# Altium PCB TourniquetPCBV1.PcbDoc (part 1 of 2)
Units mil, origin at the board's own origin, x right, y up, seen from the top; angles counter-clockwise.
Board outline 6000 x 4000 mil, 2 copper layers (Top Layer, Bottom Layer); 66 components, 50 nets, 230 pads, 0 vias.
Unrouted connection lines stored in the file: 158.
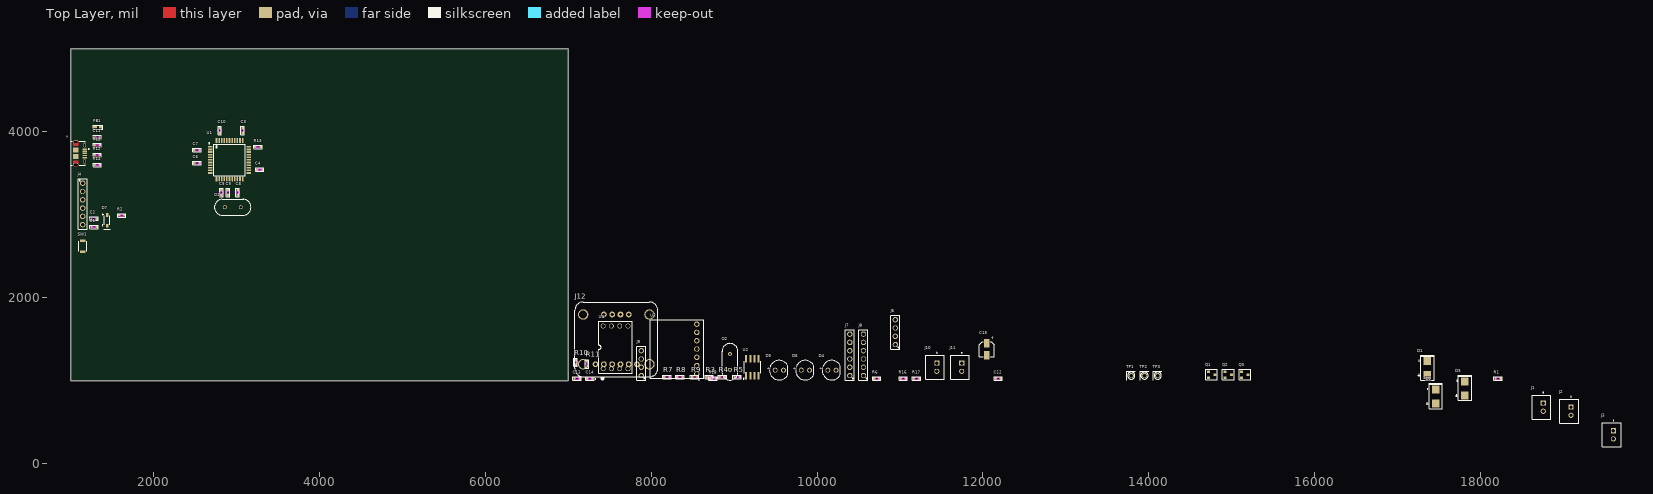
[diagram p0: Top Layer view]
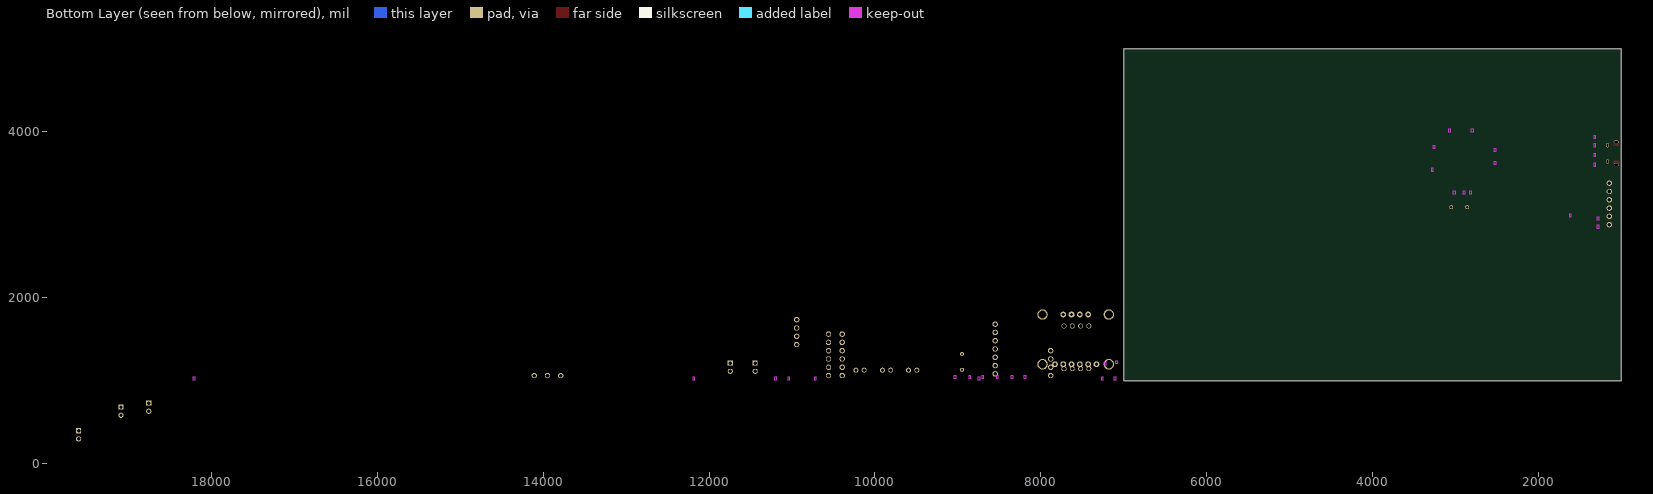
[diagram p1: Bottom Layer view, seen from below]

## Layer stack, top to bottom
Top Solder: solder mask 0.4, Solder Resist, Dk 3.5
Top Layer: signal copper 1.4
Dielectric 1: dielectric 12.6, FR-4, Dk 4.8
Bottom Layer: signal copper 1.4
Bottom Solder: solder mask 0.4, Solder Resist, Dk 3.5

## Board outline
1000,1000 7000,1000 7000,5000 1000,5000

## Design rules (kind name [scope] priority, off if disabled: settings)
Clearance [All] p1: gap=10 ignorepadtopadclearanceinfootprint=FALSE
DiffPairsRouting [All] p1: maxlimit=10 minlimit=10 mostfreqgap=10 toplayer_minwidth=15 toplayer_maxwidth=15 toplayer_prefwidth=15 bottomlayer_minwidth=15 bottomlayer_maxwidth=15 bottomlayer_prefwidth=15 maxuncoupledlength=500
PolygonConnect [All] p1: connectstyle=Relief reliefconductorwidth=10 reliefentries=4 polygonreliefangle="90 Angle" airgapwidth=10
RoutingVias [All] p1: holewidth=28 width=50 viastyle="Through Hole" minholewidth=28 minwidth=50 maxholewidth=28 maxwidth=50
SolderMaskExpansion [All] p1: expansion=4 istentingtop=FALSE
SupplyNets "Schematic Supply Nets_4" [InNet('VCC5VBAT_SW')] p1: voltage=0.000
SupplyNets "Schematic Supply Nets_3" [InNet('VCC5V0')] p2: voltage=0.000
SupplyNets "Schematic Supply Nets_2" [InNet('VCC5VBAT')] p3: voltage=0.000
SupplyNets "Schematic Supply Nets_1" [InNet('GND')] p4: voltage=0.000
Width [All] p1: maxlimit=10 minlimit=10 preferedwidth=10
29 further rules are at their usual default settings.

## Classes and differential pairs
differential pair RD: +RD_P -RD_N
differential pair D: +D_P -D_N

## Components (designator, comment, footprint, x,y, rotation, side; value= is the part's Value field where it differs from the comment)
* "Micro USB Type B" 10118194-0001LF 1112.2,3740.16 r270 top
C1 "0.1 uF" 0603_CAP 1279.53,2854.33 r180 top value=100nF
C2 "0.1 uF" 0603_CAP 1279.53,2952.76 r180 top value=100nF
C3 "0.1 uF" 0603_CAP 3070.87,4015.75 r90 top value=100nF
C4 "0.1 uF" 0603_CAP 3278.53,3543.31 r0 top value=100nF
C5 "0.1 uF" 0603_CAP 2814.96,3267.72 r270 top value=100nF
C6 "0.1 uF" 0603_CAP 2519.68,3622.05 r180 top value=100nF
C7 "0.1 uF" 0603_CAP 2519.68,3779.53 r180 top value=100nF
C8 "0.1 uF" 0603_CAP 3011.81,3267.72 r270 top value=100nF
C9 "0.1 uF" 0603_CAP 2893.7,3267.72 r270 top value=100nF
C10 "0.1 uF" 0603_CAP 2795.28,4015.75 r270 top value=100nF
C11 "0.1 uF" 0603_CAP 1318.9,3937.01 r180 top value=100nF
C12 "0.1 uF" 0603_CAP 12185,1025 r0 top value=100nF
C13 "0.1 uF" 0603_CAP 7105,1025 r0 top value=100nF
C14 "0.1 uF" 0603_CAP 7260,1025 r0 top value=100nF
C15 "865080340001" 865080340001 12047.24,1377.95 r90 top
D1 "B240AQ-13-F" SMA 17360,1150 r90 top
D2 "B240AQ-13-F" SMA 17460.63,807.09 r90 top
D3 "B240AQ-13-F" SMA 17814.96,905.51 r90 top
D4 "Through Hole LED" "RED LED" 10180,1125 r0 top
D5 "Through Hole LED" "RED LED" 9545,1125 r0 top
D6 "Through Hole LED" "RED LED" 9860,1125 r0 top
D7 "Diode" Diode 1437.01,2933.07 r90 top value=4pF
FB1 "Ferrite Bead 732-1591-2-ND" "Ferrite Bead" 1325.79,4055.12 r180 top value=100nF
J1 "B2B-XH-A" B2B-XH 18759.84,679.13 r90 top
J2 "B2B-XH-A" B2B-XH 19094.49,629.92 r90 top
J3 "B2B-XH-A" B2B-XH 19606.3,344.49 r90 top
J4 "6PIN_HEADER" 6_pin_2.54mm 1141.73,3129.92 r270 top
J6 "4 Digit 7 Segment Header" 4PIN_2.54mm 10944.88,1583.86 r90 top
J7 "6PIN_HEADER" 6_pin_2.54mm 10395,1310 r90 top
J8 "6PIN_HEADER" 6_pin_2.54mm 10560,1310 r90 top
J9 "4PIN_HEADER" 4PIN_2.54mm 7880,1210 r90 top
J10 "B2B-XH-A" B2B-XH 11445,1160 r90 top
J11 "B2B-XH-A" B2B-XH 11745,1160 r90 top
J12 "BNO055" BNO055 7578.73,1496.06 r0 top
O1 "830058383B" 830058383B 2952.76,3090.55 r180 top
O2 "AB26T-32.768KHZ-6-B" 830058383B 8950,1225 r90 top
Q1 "SI2300-TP" SOT23 14760,1070 r0 top
Q2 "SI2300-TP" SOT23 14960,1070 r0 top
Q3 "SI2300-TP" SOT23 15160,1070 r0 top
R1 "10k" 0603_RES 18215,1025 r0 top
R2 "330" 0603_RES 1614.17,2992.13 r180 top
R3 "100" 0603_RES 8700.77,1043.31 r0 top
R4 "100" 0603_RES 8858.25,1043.31 r0 top
R5 "100" 0603_RES 9035.42,1043.31 r0 top
R6 "1k" 0603_RES 10720,1025 r0 top
R7 "10k" 0603_RES 8188.96,1043.31 r0 top
R8 "10k" 0603_RES 8346.44,1043.31 r0 top
R9 "10k" 0603_RES 8523.6,1043.31 r0 top
R10 "4.7k" 0603_RES 7086.61,1220.47 r90 top
R11 "4.7k" 0603_RES 7224.41,1200.79 r90 top
R12 "22" 0603_RES 1318.9,3720.47 r180 top
R13 "10k" 0603_RES 3256.9,3818.9 r180 top
R14 "22" 0603_RES 1318.9,3602.36 r180 top
R15 "1k" 0603_RES 1318.9,3838.58 r0 top
R16 "1k" 0603_RES 11040,1025 r0 top
R17 "1k" 0603_RES 11200,1025 r0 top
R18 "10k" 0603_RES 8745,1025 r0 top
SW1 "SPST Push Button" "Push Button" 1141.73,2618.11 r90 top
TP1 "1PIN_HEADER_TEST" 1PIN_2.54mm 13790,1060 r0 top
TP2 "1PIN_HEADER_TEST" 1PIN_2.54mm 13950,1060 r0 top
TP3 "1PIN_HEADER_TEST" 1PIN_2.54mm 14110,1060 r0 top
U1 "ATMEGA32U4-AU" ATMEGA32U4-AU 2913.39,3661.42 r0 top
U2 "MCP7940M-I/SN" 8SOIC 9220,1160 r90 top
U3 "Adafruit Pressure Sensor" "Adafruit Pressure Sensor" 8550,1380 r90 top
U4 "SSCDANN015PDAA5" SSCDANN015PDAA5 7570,1400 r90 top

## Footprints (in the part's own frame and the unit in brackets; to place one, negate y for a bottom-side part, rotate by r counter-clockwise, add the part's x,y. Pads: shape width x height; smd on the part's side, far side on the other; paste and mask are expansions set on the pad)
1PIN_2.54mm [mm]
  round 1.65 hole 1.1: 1(0,0)
  silkscreen extent -1.37,-1.37 1.27,1.37
4PIN_2.54mm [mm]
  round 1.65 hole 1.1: 1(-3.81,0) 2(-1.27,0) 3(1.27,0) 4(3.81,0)
  silkscreen extent -5.18,-1.37 5.14,1.37
6_pin_2.54mm [mm]
  round 1.65 hole 1.1: 1(-6.35,0) 2(-3.81,0) 3(-1.27,0) 4(1.27,0) 5(3.81,0) 6(6.35,0)
  silkscreen extent -7.72,-1.37 7.72,1.37
8SOIC [mm]
  rect 2.2x0.6 smd: 1(-2.6,1.905) 2(-2.6,0.635) 3(-2.6,-0.635) 4(-2.6,-1.905) 5(2.6,-1.905) 6(2.6,-0.635) 7(2.6,0.635) 8(2.6,1.905)
  silkscreen extent -3.63,-2.5 1.9,2.78, body extent -3,-2.45 3,2.45, height 1.75
0603_CAP [mil]
  rect 30x32 smd paste+0 mask+0: 1(-30.5,0) 2(30.5,0)
  Top Layer keep-out region: -13.5,-14 -13.5,14 13.5,14 13.5,-14
  Keep-Out Layer region: -13.5,-16 -13.5,16 13.5,16 13.5,-16
  silkscreen extent -50,-21 50,21, body extent -31,-20 31,16, height 31
0603_RES [mil]
  rect 30x32 smd paste+0 mask+0: 1(-30.5,0) 2(30.5,0)
  Top Layer keep-out region: -13.5,-14 -13.5,14 13.5,14 13.5,-14
  Keep-Out Layer region: -13.5,-16 -13.5,16 13.5,16 13.5,-16
  silkscreen extent -50,-21 50,21, body extent -31,-16 31,16, height 28
10118194-0001LF [mm] "USB - micro B USB 2.0 Receptacle Connector 5 Position Surface Mount, Right Angle; Through Hole"
  rect 0.4x1.5 smd: 1(-1.3,1.375) 2(-0.65,1.375) 3(0,1.375) 4(0.65,1.375) 5(1.3,1.375)
  oval 0.775x1.55 hole 0.5 slot 1.15 at 90 deg mask+0: SH1(-3.5,-1.375) SH4(3.5,-1.375)
  rect 1.5x1.55 smd: SH2(1,-1.375) SH3(-1,-1.375)
  oval 1.3x0.95 hole 0.55 slot 0.9 at 0 deg: SH5(-2.5,1.325) SH6(2.5,1.325)
  Top Layer region: 3.471,-0.601 3.497,-0.603 3.523,-0.606 3.549,-0.611 3.574,-0.617 3.6,-0.624 3.624,-0.633 3.648,-0.643 3.672,-0.654 3.695,-0.667 3.717,-0.681 3.739,-0.695 3.76,-0.711 3.78,-0.728 3.799,-0.746 3.817,-0.765 3.834,-0.785 3.85,-0.806 3.864,-0.828 3.878,-0.85 3.891,-0.873 3.902,-0.897 3.912,-0.921 3.921,-0.945 3.928,-0.971 3.934,-0.996 3.939,-1.022 3.942,-1.048 3.944,-1.074 3.945,-1.1 3.945,-1.65 3.944,-1.676 3.942,-1.702 3.939,-1.728 3.934,-1.754 3.928,-1.779 3.921,-1.805 3.912,-1.829 3.902,-1.853 3.891,-1.877 3.878,-1.9 3.864,-1.922 3.85,-1.944 3.834,-1.965 3.817,-1.985 3.799,-2.004 3.78,-2.022 3.76,-2.039 3.739,-2.055 3.717,-2.069 3.695,-2.083 3.672,-2.096 3.648,-2.107 3.624,-2.117 3.6,-2.126 3.574,-2.133 3.549,-2.139 3.523,-2.144 3.497,-2.147 3.471,-2.149 3.445,-2.15 2.3,-2.15 2.3,-0.6 3.445,-0.6
  Top Layer region: -2.3,-2.15 -3.445,-2.15 -3.471,-2.149 -3.497,-2.147 -3.523,-2.144 -3.549,-2.139 -3.574,-2.133 -3.6,-2.126 -3.624,-2.117 -3.648,-2.107 -3.672,-2.096 -3.695,-2.083 -3.717,-2.069 -3.739,-2.055 -3.76,-2.039 -3.78,-2.022 -3.799,-2.004 -3.817,-1.985 -3.834,-1.965 -3.85,-1.944 -3.864,-1.922 -3.878,-1.9 -3.891,-1.877 -3.902,-1.853 -3.912,-1.829 -3.921,-1.805 -3.928,-1.779 -3.934,-1.754 -3.939,-1.728 -3.942,-1.702 -3.944,-1.676 -3.945,-1.65 -3.945,-1.1 -3.944,-1.074 -3.942,-1.048 -3.939,-1.022 -3.934,-0.996 -3.928,-0.971 -3.921,-0.945 -3.912,-0.921 -3.902,-0.897 -3.891,-0.873 -3.878,-0.85 -3.864,-0.828 -3.85,-0.806 -3.834,-0.785 -3.817,-0.765 -3.799,-0.746 -3.78,-0.728 -3.76,-0.711 -3.739,-0.695 -3.717,-0.681 -3.695,-0.667 -3.672,-0.654 -3.648,-0.643 -3.624,-0.633 -3.6,-0.624 -3.574,-0.617 -3.549,-0.611 -3.523,-0.606 -3.497,-0.603 -3.471,-0.601 -3.445,-0.6 -2.3,-0.6
  silkscreen extent -3.7,-2.82 3.7,2.73, body extent -4.02,-4.05 4.02,1.48, height 2.67
830058383B [mm]
  round 1.208 hole 0.7: 1(-2.44,0) 2(2.44,0)
  silkscreen extent -5.59,-2.42 5.64,2.43, body extent -5.53,-2.35 5.53,2.35, height 4.11
865080340001 [mm] "10 µF 16 V Aluminum Electrolytic Capacitors Radial, Can - SMD 2000 Hrs @ 105°C"
  rect 2.6x1.6 smd: 1(1.8,0) 2(-1.8,0)
  silkscreen extent -2.25,-2.25 2.25,2.25, body extent -2.45,-2.25 2.55,2.05, height 5.35
"Adafruit Pressure Sensor" [mm]
  round 1.65 hole 1.1: 1(-7.62,0) 2(-5.08,0) 3(-2.54,0) 4(0,0) 5(2.54,0) 6(5.08,0) 7(7.62,0)
  silkscreen extent -9.55,-2.1 8.98,14.23, body extent -8.97,-2.33 8.81,14.18, height 7.37
ATMEGA32U4-AU [mm]
  rect 1.5x0.5 smd: 1(-5.9,4) 2(-5.9,3.2) 3(-5.9,2.4) 4(-5.9,1.6) 5(-5.9,0.8) 6(-5.9,0) 7(-5.9,-0.8) 8(-5.9,-1.6) 9(-5.9,-2.4) 10(-5.9,-3.2) 11(-5.9,-4) 23(5.9,-4) 24(5.9,-3.2) 25(5.9,-2.4) 26(5.9,-1.6) 27(5.9,-0.8) 28(5.9,0) 29(5.9,0.8) 30(5.9,1.6) 31(5.9,2.4) 32(5.9,3.2) 33(5.9,4)
  rect 0.5x1.5 smd: 12(-4,-5.9) 13(-3.2,-5.9) 14(-2.4,-5.9) 15(-1.6,-5.9) 16(-0.8,-5.9) 17(0,-5.9) 18(0.8,-5.9) 19(1.6,-5.9) 20(2.4,-5.9) 21(3.2,-5.9) 22(4,-5.9) 34(4,5.9) 35(3.2,5.9) 36(2.4,5.9) 37(1.6,5.9) 38(0.8,5.9) 39(0,5.9) 40(-0.8,5.9) 41(-1.6,5.9) 42(-2.4,5.9) 43(-3.2,5.9) 44(-4,5.9)
  silkscreen extent -6.38,-4.8 4.8,5.23, body extent -6,-6 6,6, height 0.53
B2B-XH [mm]
  rect 1.575x1.575 / inner round 1.575 / far side rect 1.575x1.575 hole 1.05: 1(1.25,0)
  round 1.575 hole 1.05: 2(-1.25,0)
  silkscreen extent -3.7,-2.35 4.54,3.4, body extent -3.7,-2.4 3.7,3.35, height 7.01
BNO055 [mm]
  round 1.778 hole 1: 1(-6.35,-7.62) 2(-3.81,-7.62) 3(-1.27,-7.62) 4(1.27,-7.62) 5(3.81,-7.62) 6(6.35,-7.62) 7(-3.81,7.62) 8(-1.27,7.62) 9(1.27,7.62) 10(3.81,7.62)
  round 3.2 hole 2.5: P1(-10.16,7.62) P2(10.16,7.62) P3(-10.16,-7.62) P4(10.16,-7.62)
  silkscreen extent -12.7,-12.28 12.7,11.43, body extent -12.7,-10.16 12.7,10.16, height 4.6
Diode [mm]
  rrect18% 1.21x0.73 smd paste+0 mask+0.102: 1(-1.68,0) 2(1.68,0)
  silkscreen extent -2.79,-1.02 2.03,1.52, body extent -1.9,-0.8 1.9,0.8, height 1.01
"Ferrite Bead" [mm]
  rect 0.95x0.7 smd paste+0 mask+0.102: 1(-0.825,0) 2(0.825,0)
  rect 0.95x0.7 on Mech16 paste+0 mask+0.102: 1(-0.825,0) 2(0.825,0)
  silkscreen extent -1.45,-0.64 1.45,0.66, body extent -0.8,-0.4 0.8,0.4, height 0.81
"Push Button" [mm]
  rect 0.8x1.7 smd paste+0 mask+0.102: 1(-1.7,0) 2(1.7,0)
  silkscreen extent -1.5,-1.25 1.5,1.25, body extent -2,-1.25 2,1.25, height 1.75
"RED LED" [mm]
  round 1.508 hole 1: 1(-1.27,0) 2(1.27,0)
  silkscreen extent -3.03,-2.98 2.6,2.98, body extent -2.95,-2.94 2.45,2.94, height 8.7
SMA [mm]
  rect 2.5x2.3 smd: 1(-2.15,0) 2(2.15,0)
  silkscreen extent -3.7,-2.1 4,2.9, body extent -2.8,-1.97 2.8,1.97, height 2.45
SOT23 [mm]
  rect 0.9x0.8 smd: 1(-1,0.95) 2(-1,-0.95) 3(1,0)
  silkscreen extent -1.78,-1.59 1.78,1.6, body extent -1.32,-1.52 1.32,1.52, height 1.22
SSCDANN015PDAA5 [mm]
  round 1.5 hole 1.1: 1(-6.54,3.81) 2(-6.54,1.27) 3(-6.54,-1.27) 4(-6.54,-3.81) 5(6.54,-3.81) 6(6.54,-1.27) 7(6.54,1.27) 8(6.54,3.81)
  silkscreen extent -9.8,-5.08 8,5.08, body extent -6.65,-5 6.65,5, height 13.76

## Part data
*: "10118194-0001LF", Color=Black, Current Rating=1.8A, Dielectric Material="Liquid Crystal Polymer", Flammability Rating="UL94 V-0", Manufacturer=Molex, Manufacturer Lifecycle Status=ACTIVE, Manufacturer Part Number=105164-0001, Max Operating Temperature=85°C, Max Voltage Rating (AC)=30V, Min Operating Temperature=-30°C, Supplier Part Number=1051640001, Category="USB Connectors", China RoHS=Compliant, ComponentLink1Description=https://datasheet.octopart.com:443/105164-0001-Molex-datasheet-138896958.pdf?src-supplier=Upverter, ComponentLink1URL=https://datasheet.octopart.com:443/105164-0001-Molex-datasheet-138896958.pdf?src-supplier=Upverter, ComponentLink2Description=https://sigma.octopart.com:443/138896959/technical_drawing/Molex-105164-0001.pdf?src-supplier=Upverter, ComponentLink2URL=https://sigma.octopart.com:443/138896959/technical_drawing/Molex-105164-0001.pdf?src-supplier=Upverter, ComponentLink3Description=https://datasheet.octopart.com:443/105164-0001-Molex-datasheet-16324421.pdf?src-supplier=Sager+Electronics, ComponentLink3URL=https://datasheet.octopart.com:443/105164-0001-Molex-datasheet-16324421.pdf?src-supplier=Sager+Electronics, ComponentLink4Description=https://sigma.octopart.com:443/16324424/technical_drawing/Molex-105164-0001.pdf?src-supplier=Molex, ComponentLink4URL=https://sigma.octopart.com:443/16324424/technical_drawing/Molex-105164-0001.pdf?src-supplier=Molex, ComponentLink5Description=https://datasheet.octopart.com:443/105164-0001-Molex-datasheet-66419585.pdf?src-supplier=element14+APAC, ComponentLink5URL=https://datasheet.octopart.com:443/105164-0001-Molex-datasheet-66419585.pdf?src-supplier=element14+APAC, ComponentLink6Description=https://datasheet.octopart.com:443/105164-0001-Molex-datasheet-140174757.pdf?src-supplier=RS+(Formerly+Allied+Electronics), ComponentLink6URL=https://datasheet.octopart.com:443/105164-0001-Molex-datasheet-140174757.pdf?src-supplier=RS+(Formerly+Allied+Electronics), ComponentLink7Description=https://datasheet.octopart.com:443/105164-0001-Molex-datasheet-120135208.pdf?src-supplier=RS+(Formerly+Allied+Electronics), ComponentLink7URL=https://datasheet.octopart.com:443/105164-0001-Molex-datasheet-120135208.pdf?src-supplier=RS+(Formerly+Allied+Electronics), ComponentLink8Description=https://datasheet.octopart.com:443/105164-0001-Molex-datasheet-120074113.pdf?src-supplier=TME, ComponentLink8URL=https://datasheet.octopart.com:443/105164-0001-Molex-datasheet-120074113.pdf?src-supplier=TME, ComponentLink9Description=https://datasheet.octopart.com:443/105164-0001-Molex-datasheet-13747870.pdf?src-supplier=_legacy+Avnet, ComponentLink9URL=https://datasheet.octopart.com:443/105164-0001-Molex-datasheet-13747870.pdf?src-supplier=_legacy+Avnet, ComponentLink10Description=http://sigma.octopart.com:80/16324423/rohs_statement/Molex-105164-0001.pdf?src-supplier=Compliance+Statements, ComponentLink10URL=http://sigma.octopart.com:80/16324423/rohs_statement/Molex-105164-0001.pdf?src-supplier=Compliance+Statements, ComponentLink11Description=http://sigma.octopart.com:80/reach_statement/Molex-company-74.pdf?src-supplier=Compliance+Statements, ComponentLink11URL=http://sigma.octopart.com:80/reach_statement/Molex-company-74.pdf?src-supplier=Compliance+Statements, ComponentLink12Description=http://sigma.octopart.com:80/rohs_statement/Molex-company-73.pdf?src-supplier=Compliance+Statements, ComponentLink12URL=http://sigma.octopart.com:80/rohs_statement/Molex-company-73.pdf?src-supplier=Compliance+Statements, ComponentLink13Description=http://sigma.octopart.com:80/conflict_mineral_statement/Molex-company-72.pdf?src-supplier=Compliance+Statements, ComponentLink13URL=http://sigma.octopart.com:80/conflict_mineral_statement/Molex-company-72.pdf?src-supplier=Compliance+Statements, Connector Type=USB, Contact Gender=Female, Contact Material=Brass, Contact Plating=Gold, Country of Origin=US, Depth=5.15mm, Gender=Female, Halogen Free="Low Halogen", Height=2.715mm, Housing Material=Polymer, Length=7.5mm, Lifecycle Status=Production, Mounting Technology="Horizontal, Surface Mount", Number of Circuits=5, Number of Contacts=5, Number of Ports=1, Number of Rows=1, Number of Terminals=5, Orientation="Right Angle", Pins=5, Pitch=650µm, Plating=Gold, Pricing="1300=0.47412, 16900=0.40682, 40300=0.38931, 80600=0.36143, 200200=0.329 (USD)", Radiation Hardening=No, REACH SVHC=Yes, RoHS=Compliant, Schedule B=8536695050, Shell Material="Stainless Steel", Stock=9100, Supplier=Avnet, Termination=Solder, USB Standard="USB 2.0", Voltage Rating=30V, Voltage Rating (AC)=30V
C1 C2 C3 C4 C5 C6 C7 C8 C9 C10 C11 C12 C13 C14: library part CAPACITOR, "16V 100nF X7R ±10% 0603 Multilayer Ceramic Capacitors MLCC - SMD/SMT ROHS", Case Code (Imperial)=0603, Case Code (Metric)=1608, Dielectric=X7R, Dielectric Material=Ceramic, Insulation Resistance=100GΩ, Manufacturer="Yageo Group", Manufacturer Part Number=CC0603KRX7R7BB104, Max Operating Temperature=125°C, Min Operating Temperature=-55°C, Tolerance=10%, Voltage=16V, Case/Package=0603, Category="Ceramic Capacitors", China RoHS=Compliant, ComponentLink1Description=https://datasheet.octopart.com:443/CC0603KRX7R7BB104-Yageo-datasheet-177165144.pdf?src-supplier=IHS, ComponentLink1URL=https://datasheet.octopart.com:443/CC0603KRX7R7BB104-Yageo-datasheet-177165144.pdf?src-supplier=IHS, ComponentLink2Description=https://datasheet.octopart.com:443/CC0603KRX7R7BB104-Yageo-datasheet-82288757.pdf?src-supplier=Upverter, ComponentLink2URL=https://datasheet.octopart.com:443/CC0603KRX7R7BB104-Yageo-datasheet-82288757.pdf?src-supplier=Upverter, ComponentLink3Description=https://datasheet.octopart.com/CC0603KRX7R7BB104-Yageo-datasheet-10883670.pdf, ComponentLink3URL=https://datasheet.octopart.com/CC0603KRX7R7BB104-Yageo-datasheet-10883670.pdf, ComponentLink4Description=https://datasheet.octopart.com:443/CC0603KRX7R7BB104-Yageo-datasheet-181968638.pdf?src-supplier=Newark, ComponentLink4URL=https://datasheet.octopart.com:443/CC0603KRX7R7BB104-Yageo-datasheet-181968638.pdf?src-supplier=Newark, ComponentLink5Description=https://datasheet.octopart.com:443/CC0603KRX7R7BB104-Phycomp-datasheet-499490.pdf?src-supplier=Newark, ComponentLink5URL=https://datasheet.octopart.com:443/CC0603KRX7R7BB104-Phycomp-datasheet-499490.pdf?src-supplier=Newark, ComponentLink6Description=https://datasheet.octopart.com:443/CC0603KRX7R7BB104-Yageo-datasheet-62336348.pdf?src-supplier=Newark, ComponentLink6URL=https://datasheet.octopart.com:443/CC0603KRX7R7BB104-Yageo-datasheet-62336348.pdf?src-supplier=Newark, ComponentLink7Description=https://datasheet.octopart.com:443/CC0603KRX7R7BB104-Yageo-datasheet-15895757.pdf?src-supplier=Newark, ComponentLink7URL=https://datasheet.octopart.com:443/CC0603KRX7R7BB104-Yageo-datasheet-15895757.pdf?src-supplier=Newark, ComponentLink8Description=https://datasheet.octopart.com:443/CC0603KRX7R7BB104-Yageo-datasheet-182050803.pdf?src-supplier=Newark, ComponentLink8URL=https://datasheet.octopart.com:443/CC0603KRX7R7BB104-Yageo-datasheet-182050803.pdf?src-supplier=Newark, ComponentLink9Description=https://datasheet.octopart.com:443/CC0603KRX7R7BB104-Yageo-datasheet-151948686.pdf?src-supplier=Farnell, ComponentLink9URL=https://datasheet.octopart.com:443/CC0603KRX7R7BB104-Yageo-datasheet-151948686.pdf?src-supplier=Farnell, ComponentLink10Description=https://datasheet.octopart.com:443/CC0603KRX7R7BB104-Phycomp-datasheet-500777.pdf?src-supplier=Farnell, ComponentLink10URL=https://datasheet.octopart.com:443/CC0603KRX7R7BB104-Phycomp-datasheet-500777.pdf?src-supplier=Farnell, ComponentLink11Description=https://datasheet.octopart.com:443/CC0603KRX7R7BB104-Phycomp-datasheet-519481.pdf?src-supplier=element14, ComponentLink11URL=https://datasheet.octopart.com:443/CC0603KRX7R7BB104-Phycomp-datasheet-519481.pdf?src-supplier=element14, ComponentLink12Description=https://datasheet.octopart.com:443/CC0603KRX7R7BB104-Yageo-datasheet-8701427.pdf?src-supplier=element14, ComponentLink12URL=https://datasheet.octopart.com:443/CC0603KRX7R7BB104-Yageo-datasheet-8701427.pdf?src-supplier=element14, ComponentLink13Description=https://datasheet.octopart.com:443/CC0603KRX7R7BB104-Yageo-datasheet-5301394.pdf?src-supplier=element14, ComponentLink13URL=https://datasheet.octopart.com:443/CC0603KRX7R7BB104-Yageo-datasheet-5301394.pdf?src-supplier=element14, ComponentLink14Description=https://datasheet.octopart.com:443/CC0603KRX7R7BB104-Yageo-datasheet-166511530.pdf?src-supplier=Future+Electronics, ComponentLink14URL=https://datasheet.octopart.com:443/CC0603KRX7R7BB104-Yageo-datasheet-166511530.pdf?src-supplier=Future+Electronics, ComponentLink15Description=https://datasheet.octopart.com:443/CC0603KRX7R7BB104-Yageo-datasheet-137700082.pdf?src-supplier=Future+Electronics, ComponentLink15URL=https://datasheet.octopart.com:443/CC0603KRX7R7BB104-Yageo-datasheet-137700082.pdf?src-supplier=Future+Electronics, ComponentLink16Description=https://datasheet.octopart.com:443/CC0603KRX7R7BB104-Yageo-datasheet-137700084.pdf?src-supplier=Future+Electronics, ComponentLink16URL=https://datasheet.octopart.com:443/CC0603KRX7R7BB104-Yageo-datasheet-137700084.pdf?src-supplier=Future+Electronics, ComponentLink17Description=https://datasheet.octopart.com:443/CC0603KRX7R7BB104-Yageo-datasheet-27626582.pdf?src-supplier=Future+Electronics, ComponentLink17URL=https://datasheet.octopart.com:443/CC0603KRX7R7BB104-Yageo-datasheet-27626582.pdf?src-supplier=Future+Electronics, ComponentLink18Description=https://datasheet.octopart.com:443/CC0603KRX7R7BB104-Yageo-datasheet-12526321.pdf?src-supplier=Future+Electronics, ComponentLink18URL=https://datasheet.octopart.com:443/CC0603KRX7R7BB104-Yageo-datasheet-12526321.pdf?src-supplier=Future+Electronics, ComponentLink19Description=https://datasheet.octopart.com:443/CC0603KRX7R7BB104-Yageo-datasheet-10911834.pdf?src-supplier=Future+Electronics, ComponentLink19URL=https://datasheet.octopart.com:443/CC0603KRX7R7BB104-Yageo-datasheet-10911834.pdf?src-supplier=Future+Electronics, ComponentLink20Description=https://datasheet.octopart.com:443/CC0603KRX7R7BB104-Yageo-datasheet-8324442.pdf?src-supplier=Future+Electronics, ComponentLink20URL=https://datasheet.octopart.com:443/CC0603KRX7R7BB104-Yageo-datasheet-8324442.pdf?src-supplier=Future+Electronics, ComponentLink21Description=https://datasheet.octopart.com:443/CC0603KRX7R7BB104-Yageo-Group-datasheet-165992755.pdf?src-supplier=ODG+(Origin+Data+Global), ComponentLink21URL=https://datasheet.octopart.com:443/CC0603KRX7R7BB104-Yageo-Group-datasheet-165992755.pdf?src-supplier=ODG+(Origin+Data+Global), ComponentLink22Description=https://datasheet.octopart.com:443/CC0603KRX7R7BB104-Yageo-datasheet-140260305.pdf?src-supplier=SOS+electronic, ComponentLink22URL=https://datasheet.octopart.com:443/CC0603KRX7R7BB104-Yageo-datasheet-140260305.pdf?src-supplier=SOS+electronic, ComponentLink23Description=https://datasheet.octopart.com:443/CC0603KRX7R7BB104-Yageo-datasheet-178018956.pdf?src-supplier=Burklin+Elektronik, ComponentLink23URL=https://datasheet.octopart.com:443/CC0603KRX7R7BB104-Yageo-datasheet-178018956.pdf?src-supplier=Burklin+Elektronik, ComponentLink24Description=https://datasheet.octopart.com:443/CC0603KRX7R7BB104-Yageo-datasheet-17600895.pdf?src-supplier=TME, ComponentLink24URL=https://datasheet.octopart.com:443/CC0603KRX7R7BB104-Yageo-datasheet-17600895.pdf?src-supplier=TME, ComponentLink25Description=https://datasheet.octopart.com:443/CC0603KRX7R7BB104-Yageo-datasheet-118396.pdf?src-supplier=DigiKey, ComponentLink25URL=https://datasheet.octopart.com:443/CC0603KRX7R7BB104-Yageo-datasheet-118396.pdf?src-supplier=DigiKey, ComponentLink26Description=http://sigma.octopart.com:80/conflict_mineral_statement/Yageo-company-3.pdf?src-supplier=Compliance+Statements, ComponentLink26URL=http://sigma.octopart.com:80/conflict_mineral_statement/Yageo-company-3.pdf?src-supplier=Compliance+Statements, ComponentLink27Description=http://sigma.octopart.com:80/rohs_statement/Yageo-company-2.pdf?src-supplier=Compliance+Statements, ComponentLink27URL=http://sigma.octopart.com:80/rohs_statement/Yageo-company-2.pdf?src-supplier=Compliance+Statements, Composition=Ceramic, Depth=800µm, Halogen Free="Halogen Free", Height=800µm, Lead Free="Lead Free", Length=1.6mm, Lifecycle Status=Production, Material=Ceramic, Mounting Technology="Surface Mount", Number of Terminals=2, Pins=2, Pricing="4000=0.00582, 8000=0.00559, 16000=0.00541, 32000=0.00522, 64000=0.00504 (USD)", Radiation Hardening=No, REACH SVHC=Yes, RoHS=Compliant, Schedule B="8532240020, 8532240020|8532240020, 8532240020|8532240020|8532240020, 8532240020|8532240020|8532240020|8532240020", Stock=1252000, Supplier=Avnet, Supplier Part Number=CC0603KRX7R7BB104, Termination=SMD/SMT, Thickness=889µm, Voltage Rating=16V, Voltage Rating (DC)=16V, Width=800µm
C15: library part CAP_POLARIZED, "10 µF 16 V Aluminum Electrolytic Capacitors Radial, Can - SMD 2000 Hrs @ 105°C", Current Rating=2A, Manufacturer=Wurth, Manufacturer Part Number=0878310641, Max Operating Temperature=105°C, Min Operating Temperature=-55°C, Supplier Part Number 1=WM3590-ND, Voltage Rating=125V, ComponentLink1Description=Datasheet, ComponentLink1URL=https://tools.molex.com/pdm_docs/ps/PS-87831-027.pdf, Fastening Type="Latch Holder", Gender=Male, Mount="Through Hole", Number of Positions=6, Number of Rows=2, Orientation=Vertical, Part Number=865080340001, Reviewed=No, Series="Milli-Grid 87831", Supplier 1=Digi-Key
D1 D2 D3: library part SCHOTTKY, Current Rating=2A, Manufacturer="Diodes Incorporated", Supplier Part Number 1=WM3590-ND, Voltage Rating=40, ComponentLink1Description=Datasheet, ComponentLink1URL=https://tools.molex.com/pdm_docs/ps/PS-87831-027.pdf, Manufacturer Part Number=B240AQ-13-F, Mount=Surface, Part Number=B240AQ-13-F, Reviewed=No, Series=-
D4 D5 D6: library part "LED RED DIFFUSED 5MM ROUND T/H", "Red 645nm LED Indication - Discrete 2.1V Radial", Case/Package=Radial, Color=Red, Forward Current=100mA, Forward Voltage=2.1V, Manufacturer="Wurth Elektronik", Manufacturer Part Number=151051RS11000, Max Operating Temperature=85°C, Max Reverse Voltage (DC)=5V, Min Operating Temperature=-40°C, Test Current=20mA, Category=LEDs, ComponentLink1Description=https://datasheet.octopart.com:443/151051RS11000-Wurth-Elektronik-datasheet-168474692.pdf?src-supplier=Wurth+Elektronik, ComponentLink1URL=https://datasheet.octopart.com:443/151051RS11000-Wurth-Elektronik-datasheet-168474692.pdf?src-supplier=Wurth+Elektronik, ComponentLink2Description=https://datasheet.octopart.com:443/151051RS11000-W%C3%BCrth-Elektronik-datasheet-83005830.pdf?src-supplier=Future+Electronics, ComponentLink2URL=https://datasheet.octopart.com:443/151051RS11000-W%C3%BCrth-Elektronik-datasheet-83005830.pdf?src-supplier=Future+Electronics, ComponentLink3Description=https://datasheet.octopart.com:443/151051RS11000-W%C3%BCrth-Elektronik-datasheet-15983824.pdf?src-supplier=element14+APAC, ComponentLink3URL=https://datasheet.octopart.com:443/151051RS11000-W%C3%BCrth-Elektronik-datasheet-15983824.pdf?src-supplier=element14+APAC, Dominant Wavelength=645nm, Height=8.6mm, Length=5mm, Lens Size=5mm, Lens Style="Circular, Diffused, Round", Luminous Intensity=30mcd, Mounting Technology="Through Hole", Packaging=Bulk, Peak Wavelength=650nm, Pricing="5=0.269, 10=0.262, 25=0.255, 50=0.248, 100=0.217, 500=0.201 (CAD)", REACH SVHC=Unknown, RoHS=Compliant, Stock=1883, Supplier=Newark, Supplier Part Number=151051RS11000, Viewing Angle=60°, Wavelength=630nm, Width=5mm
D7: "Diode 100 V 150mA Surface Mount SOD-123", Average Rectified Current=150mA, Forward Voltage=1V, Manufacturer=onsemi, Manufacturer Lifecycle Status=ACTIVE, Manufacturer Part Number=1N4148WS, Max Forward Surge Current (Ifsm)=4A, Max Junction Temperature (Tj)=150°C, Max Power Dissipation=200mW, Max Repetitive Reverse Voltage (Vrrm)=75V, Min Operating Temperature=-55°C, Peak Reverse Current=5µA, Category="Rectifier Diodes", China RoHS=Compliant, ComponentLink1Description=https://datasheet.octopart.com:443/1N4148WS-ON-Semiconductor-datasheet-154551630.pdf?src-supplier=Farnell, ComponentLink1URL=https://datasheet.octopart.com:443/1N4148WS-ON-Semiconductor-datasheet-154551630.pdf?src-supplier=Farnell, ComponentLink2Description=https://datasheet.octopart.com:443/1N4148WS-Fairchild-Semiconductor-datasheet-67878664.pdf?src-supplier=Farnell, ComponentLink2URL=https://datasheet.octopart.com:443/1N4148WS-Fairchild-Semiconductor-datasheet-67878664.pdf?src-supplier=Farnell, ComponentLink3Description=https://datasheet.octopart.com:443/1N4148WS-Fairchild-Semiconductor-datasheet-68650011.pdf?src-supplier=Farnell, ComponentLink3URL=https://datasheet.octopart.com:443/1N4148WS-Fairchild-Semiconductor-datasheet-68650011.pdf?src-supplier=Farnell, ComponentLink4Description=https://datasheet.octopart.com:443/1N4148WS-ON-Semiconductor-datasheet-11741836.pdf?src-supplier=Upverter, ComponentLink4URL=https://datasheet.octopart.com:443/1N4148WS-ON-Semiconductor-datasheet-11741836.pdf?src-supplier=Upverter, ComponentLink5Description=https://datasheet.octopart.com:443/1N4148WS-ON-Semiconductor-datasheet-137236190.pdf?src-supplier=Upverter, ComponentLink5URL=https://datasheet.octopart.com:443/1N4148WS-ON-Semiconductor-datasheet-137236190.pdf?src-supplier=Upverter, ComponentLink6Description=https://sigma.octopart.com:443/138895951/technical_drawing/ON-Semiconductor-1N4148WS.pdf?src-supplier=Upverter, ComponentLink6URL=https://sigma.octopart.com:443/138895951/technical_drawing/ON-Semiconductor-1N4148WS.pdf?src-supplier=Upverter, ComponentLink7Description=https://datasheet.octopart.com:443/1N4148WS-ON-Semiconductor-datasheet-41168538.pdf?src-supplier=IHS, ComponentLink7URL=https://datasheet.octopart.com:443/1N4148WS-ON-Semiconductor-datasheet-41168538.pdf?src-supplier=IHS, ComponentLink8Description=https://datasheet.octopart.com:443/1N4148WS-onsemi-datasheet-175423434.pdf?src-supplier=IHS, ComponentLink8URL=https://datasheet.octopart.com:443/1N4148WS-onsemi-datasheet-175423434.pdf?src-supplier=IHS, ComponentLink9Description=https://datasheet.octopart.com:443/1N4148WS-onsemi-datasheet-181265883.pdf?src-supplier=IHS, ComponentLink9URL=https://datasheet.octopart.com:443/1N4148WS-onsemi-datasheet-181265883.pdf?src-supplier=IHS, ComponentLink10Description=https://datasheet.octopart.com:443/1N4148WS-ON-Semiconductor-datasheet-85393213.pdf?src-supplier=onsemi, ComponentLink10URL=https://datasheet.octopart.com:443/1N4148WS-ON-Semiconductor-datasheet-85393213.pdf?src-supplier=onsemi, ComponentLink11Description=https://datasheet.octopart.com:443/1N4148WS-ON-Semiconductor-datasheet-86684483.pdf?src-supplier=onsemi, ComponentLink11URL=https://datasheet.octopart.com:443/1N4148WS-ON-Semiconductor-datasheet-86684483.pdf?src-supplier=onsemi, ComponentLink12Description=https://datasheet.octopart.com:443/1N4148WS-ON-Semiconductor-datasheet-86681927.pdf?src-supplier=element14+APAC, ComponentLink12URL=https://datasheet.octopart.com:443/1N4148WS-ON-Semiconductor-datasheet-86681927.pdf?src-supplier=element14+APAC, ComponentLink13Description=https://datasheet.octopart.com:443/1N4148WS-Fairchild-datasheet-514620.pdf?src-supplier=Fairchild+Semiconductor, ComponentLink13URL=https://datasheet.octopart.com:443/1N4148WS-Fairchild-datasheet-514620.pdf?src-supplier=Fairchild+Semiconductor, ComponentLink14Description=https://sigma.octopart.com:443/17343424/technical_drawing/Fairchild-Semiconductor-1N4148WS.pdf?src-supplier=Fairchild+Semiconductor, ComponentLink14URL=https://sigma.octopart.com:443/17343424/technical_drawing/Fairchild-Semiconductor-1N4148WS.pdf?src-supplier=Fairchild+Semiconductor, ComponentLink15Description=https://datasheet.octopart.com:443/1N4148WS-Fairchild-Semiconductor-datasheet-14041777.pdf?src-supplier=iiiC, ComponentLink15URL=https://datasheet.octopart.com:443/1N4148WS-Fairchild-Semiconductor-datasheet-14041777.pdf?src-supplier=iiiC, ComponentLink16Description=https://datasheet.octopart.com:443/1N4148WS-Fairchild-Semiconductor-datasheet-67909704.pdf?src-supplier=Newark, ComponentLink16URL=https://datasheet.octopart.com:443/1N4148WS-Fairchild-Semiconductor-datasheet-67909704.pdf?src-supplier=Newark, ComponentLink17Description=https://datasheet.octopart.com:443/1N4148WS-Fairchild-Semiconductor-datasheet-68364970.pdf?src-supplier=Newark, ComponentLink17URL=https://datasheet.octopart.com:443/1N4148WS-Fairchild-Semiconductor-datasheet-68364970.pdf?src-supplier=Newark, ComponentLink18Description=http://sigma.octopart.com:80/150599222/rohs_statement/ON-Semiconductor-1N4148WS.pdf?src-supplier=Compliance+Statements, ComponentLink18URL=http://sigma.octopart.com:80/150599222/rohs_statement/ON-Semiconductor-1N4148WS.pdf?src-supplier=Compliance+Statements, ComponentLink19Description=http://sigma.octopart.com:80/17343422/reach_statement/Fairchild-Semiconductor-1N4148WS.pdf?src-supplier=Compliance+Statements, ComponentLink19URL=http://sigma.octopart.com:80/17343422/reach_statement/Fairchild-Semiconductor-1N4148WS.pdf?src-supplier=Compliance+Statements, ComponentLink20Description=http://sigma.octopart.com:80/17343423/materials_sheet/Fairchild-Semiconductor-1N4148WS.pdf?src-supplier=Compliance+Statements, ComponentLink20URL=http://sigma.octopart.com:80/17343423/materials_sheet/Fairchild-Semiconductor-1N4148WS.pdf?src-supplier=Compliance+Statements, ComponentLink21Description=http://sigma.octopart.com:80/33026183/reach_statement/Fairchild-Semiconductor-1N4148WS.pdf?src-supplier=Compliance+Statements, ComponentLink21URL=http://sigma.octopart.com:80/33026183/reach_statement/Fairchild-Semiconductor-1N4148WS.pdf?src-supplier=Compliance+Statements, ComponentLink22Description=http://sigma.octopart.com:80/33026185/materials_sheet/Fairchild-Semiconductor-1N4148WS.pdf?src-supplier=Compliance+Statements, ComponentLink22URL=http://sigma.octopart.com:80/33026185/materials_sheet/Fairchild-Semiconductor-1N4148WS.pdf?src-supplier=Compliance+Statements, ComponentLink23Description=http://sigma.octopart.com:80/reach_statement/ON-Semiconductor-company-79.pdf?src-supplier=Compliance+Statements, ComponentLink23URL=http://sigma.octopart.com:80/reach_statement/ON-Semiconductor-company-79.pdf?src-supplier=Compliance+Statements, ComponentLink24Description=http://sigma.octopart.com:80/rohs_statement/Fairchild-Semiconductor-company-11.pdf?src-supplier=Compliance+Statements, ComponentLink24URL=http://sigma.octopart.com:80/rohs_statement/Fairchild-Semiconductor-company-11.pdf?src-supplier=Compliance+Statements, ComponentLink25Description=http://sigma.octopart.com:80/rohs_statement/Fairchild-Semiconductor-company-10.pdf?src-supplier=Compliance+Statements, ComponentLink25URL=http://sigma.octopart.com:80/rohs_statement/Fairchild-Semiconductor-company-10.pdf?src-supplier=Compliance+Statements, ComponentLink26Description=http://sigma.octopart.com:80/reach_statement/Fairchild-Semiconductor-company-9.pdf?src-supplier=Compliance+Statements, ComponentLink26URL=http://sigma.octopart.com:80/reach_statement/Fairchild-Semiconductor-company-9.pdf?src-supplier=Compliance+Statements, ComponentLink27Description=https://octopart.com:443/opatz8j6/c1?t=uHNM4vEE5RF4Wag2R8kp6VlT4pqZhBeJnwFOwXCl1LdBIS0OfKt6iLU6zSwumjeV84ZoVx-BohKOdz8WxXol_lFRhccKbbirABoiNNEUOoiiHpLvrlnaqw6ivq0fNiOAwmbnwS_wu4a_bpVA6OlhtCLPYRSnKrIi2lsKLrM-59zupe5GdMDxNcDcvexuQu623eH8JwKLKAOtVvsRb9B5uh7SaBNx-mVh-99rNoWwC-t1ZI7kNy9N7MQnwsOnwV2wEnePMA_8VNOs7YOCSySFX_D5sQjssxvPaJMzGX3Fu5hAYAWH6C6RGVn2R7L8ham7Ii6Y7W0JBgvKChIBqfSyj4KKD9x85vg38LCZ&src-supplier=Compliance+Statements, ComponentLink27URL=https://octopart.com:443/opatz8j6/c1?t=uHNM4vEE5RF4Wag2R8kp6VlT4pqZhBeJnwFOwXCl1LdBIS0OfKt6iLU6zSwumjeV84ZoVx-BohKOdz8WxXol_lFRhccKbbirABoiNNEUOoiiHpLvrlnaqw6ivq0fNiOAwmbnwS_wu4a_bpVA6OlhtCLPYRSnKrIi2lsKLrM-59zupe5GdMDxNcDcvexuQu623eH8JwKLKAOtVvsRb9B5uh7SaBNx-mVh-99rNoWwC-t1ZI7kNy9N7MQnwsOnwV2wEnePMA_8VNOs7YOCSySFX_D5sQjssxvPaJMzGX3Fu5hAYAWH6C6RGVn2R7L8ham7Ii6Y7W0JBgvKChIBqfSyj4KKD9x85vg38LCZ&src-supplier=Compliance+Statements, ComponentLink28Description=https://octopart.com:443/opatz8j6/c1?t=JoVNp00jKFgAwlYcNpqrHNBvQdEgXnvd9TtzPlbpkuwn1q6IGg3foLc9dMjek33MGok0_F9d8-FklcBG_3-NN3HiNPj-kIq-kDcMbF-5G_YGsbIpjuyZJMIeAynYQr8ACdD7CYDv5pcWsenCztYc-VaJWKdxwlJUKaNsU8AAFB64gurg-TyIZkyutiLJlTN7a9uopgYHLR-wf0BKqemv6J5tGI6NWqyR1yTTVq2bu8gDDCjNmn8cXihQjkrKXmsKdX0UxqSCrQoxvuBozyVXOHg47yfoLsXgcrCe8i61tiXk82lhNmjIF86wLJ1dVeH3LjIwj5NhzpWWIrfWgcJvgwRxNIZIgYQ13nuGCQ&src-supplier=Compliance+Statements, ComponentLink28URL=https://octopart.com:443/opatz8j6/c1?t=JoVNp00jKFgAwlYcNpqrHNBvQdEgXnvd9TtzPlbpkuwn1q6IGg3foLc9dMjek33MGok0_F9d8-FklcBG_3-NN3HiNPj-kIq-kDcMbF-5G_YGsbIpjuyZJMIeAynYQr8ACdD7CYDv5pcWsenCztYc-VaJWKdxwlJUKaNsU8AAFB64gurg-TyIZkyutiLJlTN7a9uopgYHLR-wf0BKqemv6J5tGI6NWqyR1yTTVq2bu8gDDCjNmn8cXihQjkrKXmsKdX0UxqSCrQoxvuBozyVXOHg47yfoLsXgcrCe8i61tiXk82lhNmjIF86wLJ1dVeH3LjIwj5NhzpWWIrfWgcJvgwRxNIZIgYQ13nuGCQ&src-supplier=Compliance+Statements, Contact Plating=Tin, Element Configuration=Single, Forward Current=150mA, Height=900µm, Lead Free="Lead Free", Length=1.8mm, Lifecycle Status=Production, Max Operating Temperature=150°C, Max Output current=150mA, Max Reverse Voltage (DC)=75V, Mounting Technology="Surface Mount", Number of Elements=1, Number of Terminals=2, Packaging="Cut Tape", Pins=2, Power Dissipation=200mW, Pricing="3000=0.01888, 6000=0.01822, 12000=0.01795, 24000=0.01769, 48000=0.01742 (USD)", Radiation Hardening=No, REACH SVHC=Yes, Recovery Time=4ns, Reverse Recovery Time=4ns, Reverse Standoff Voltage=75V, Reverse Voltage=75V, RoHS=Compliant, Schedule B="8541100070, 8541100070|8541100070|8541100070|8541100070|8541100070|8541100070|8541100070|8541100070|8541100070|8541100070|8541100070|8541100070|8541100070|8541100070|8541100070|8541100070|8541100070|8541100070|8541100070|8541100070|8541100070|8541100070|8541100070|85", Stock=171000, Supplier=Avnet, Supplier Part Number=1N4148WS, Weight=27.6mg, Width=1.35mm
FB1: "30 Ohms @ 100 MHz 1 Signal Line Ferrite Bead 0603 (1608 Metric) 3A 40mOhm", Case Code (Imperial)=0805, Case Code (Metric)=2012, Dielectric=X7R, Dielectric Material=Ceramic, Manufacturer=KEMET, Manufacturer Part Number=C0805F104K4RACTU, Max Operating Temperature=125°C, Min Operating Temperature=-55°C, Tolerance=10%, Voltage Rating=16V, Case/Package=0805, Category="Ceramic Capacitors", China RoHS=Compliant, ComponentLink1Description=https://datasheet.octopart.com:443/C0805F104K4RACTU-KEMET-datasheet-178087927.pdf?src-supplier=IHS, ComponentLink1URL=https://datasheet.octopart.com:443/C0805F104K4RACTU-KEMET-datasheet-178087927.pdf?src-supplier=IHS, ComponentLink2Description=https://datasheet.octopart.com/C0805F104K4RACTU-KEMET-datasheet-84169754.pdf, ComponentLink2URL=https://datasheet.octopart.com/C0805F104K4RACTU-KEMET-datasheet-84169754.pdf, Features="Soft Termination", Height=1.25mm, Length=2mm, Lifecycle Status=Production, Mounting Technology="Surface Mount", Number of Terminals=2, Pricing="10=0.244 (CAD)", REACH SVHC=Yes, RoHS=Compliant, Stock=2981, Supplier=Newark, Supplier Part Number=C0805F104K4RACTU, Termination=SMD/SMT, Thickness=1.397mm, Voltage Rating (DC)=16V, Weight=5.499807mg, Width=1.25mm
J1 J2 J3 J10 J11: "Two Pin JST XH Header", Color=Black, Current Rating=7A, Manufacturer=Samtec, Manufacturer Lifecycle Status=PRODUCTION, Manufacturer Part Number=TSM-102-01-L-SV, Max Operating Temperature=125°C, Max Voltage Rating (AC)=475V, Min Operating Temperature=-55°C, Category="Headers and Wire Housings", ComponentLink1Description=https://datasheet.octopart.com:443/TSM-102-01-L-SV-Samtec-datasheet-141160580.pdf?src-supplier=Master+Electronics, ComponentLink1URL=https://datasheet.octopart.com:443/TSM-102-01-L-SV-Samtec-datasheet-141160580.pdf?src-supplier=Master+Electronics, ComponentLink2Description=https://datasheet.octopart.com:443/TSM-102-01-L-SV-Samtec-datasheet-97319594.pdf?src-supplier=Sager+Electronics, ComponentLink2URL=https://datasheet.octopart.com:443/TSM-102-01-L-SV-Samtec-datasheet-97319594.pdf?src-supplier=Sager+Electronics, ComponentLink3Description=https://datasheet.octopart.com:443/TSM-102-01-L-SV-Samtec-datasheet-155753699.pdf?src-supplier=Sager+Electronics, ComponentLink3URL=https://datasheet.octopart.com:443/TSM-102-01-L-SV-Samtec-datasheet-155753699.pdf?src-supplier=Sager+Electronics, ComponentLink4Description=https://datasheet.octopart.com:443/TSM-102-01-L-SV-Samtec-datasheet-151555687.pdf?src-supplier=Sager+Electronics, ComponentLink4URL=https://datasheet.octopart.com:443/TSM-102-01-L-SV-Samtec-datasheet-151555687.pdf?src-supplier=Sager+Electronics, ComponentLink5Description=https://sigma.octopart.com:443/141446549/technical_drawing/Samtec-TSM-102-01-L-SV.pdf?src-supplier=Samtec, ComponentLink5URL=https://sigma.octopart.com:443/141446549/technical_drawing/Samtec-TSM-102-01-L-SV.pdf?src-supplier=Samtec, ComponentLink6Description=https://sigma.octopart.com:443/97319600/technical_drawing/Samtec-TSM-102-01-L-SV.pdf?src-supplier=Samtec, ComponentLink6URL=https://sigma.octopart.com:443/97319600/technical_drawing/Samtec-TSM-102-01-L-SV.pdf?src-supplier=Samtec, ComponentLink7Description=https://datasheet.octopart.com:443/TSM-102-01-L-SV-Samtec-datasheet-68527555.pdf?src-supplier=Farnell, ComponentLink7URL=https://datasheet.octopart.com:443/TSM-102-01-L-SV-Samtec-datasheet-68527555.pdf?src-supplier=Farnell, ComponentLink8Description=https://datasheet.octopart.com:443/TSM-102-01-L-SV-Samtec-datasheet-31667586.pdf?src-supplier=Farnell, ComponentLink8URL=https://datasheet.octopart.com:443/TSM-102-01-L-SV-Samtec-datasheet-31667586.pdf?src-supplier=Farnell, ComponentLink9Description=https://datasheet.octopart.com:443/TSM-102-01-L-SV-Samtec-datasheet-41643181.pdf?src-supplier=element14+APAC, ComponentLink9URL=https://datasheet.octopart.com:443/TSM-102-01-L-SV-Samtec-datasheet-41643181.pdf?src-supplier=element14+APAC, ComponentLink10Description=https://datasheet.octopart.com:443/TSM-102-01-L-SV-Samtec-datasheet-179063997.pdf?src-supplier=JRH+Electronics, ComponentLink10URL=https://datasheet.octopart.com:443/TSM-102-01-L-SV-Samtec-datasheet-179063997.pdf?src-supplier=JRH+Electronics, ComponentLink11Description=https://datasheet.octopart.com:443/TSM-102-01-L-SV-Samtec-datasheet-116533474.pdf?src-supplier=Toby+Electronics, ComponentLink11URL=https://datasheet.octopart.com:443/TSM-102-01-L-SV-Samtec-datasheet-116533474.pdf?src-supplier=Toby+Electronics, ComponentLink12Description=https://datasheet.octopart.com:443/TSM-102-01-L-SV-Samtec-datasheet-21214708.pdf?src-supplier=Newark, ComponentLink12URL=https://datasheet.octopart.com:443/TSM-102-01-L-SV-Samtec-datasheet-21214708.pdf?src-supplier=Newark, Connector Type="Male Pin", Contact Material=Bronze, Contact Mating Length=5.842mm, Contact Plating=Gold, Depth=2.54mm, Gender=Male, Housing Color=Black, Housing Material=Polymer, Lead Free="Lead Free", Length=5.08mm, Lifecycle Status=Production, Max Current Rating=7A, Mounting Technology="Surface Mount", Number of Contacts=2, Number of Positions=2, Number of Rows=1, Pins=2, Pitch=2.54mm, Pricing="1=0.42, 250=0.355, 1000=0.302, 5000=0.249, 10000=0.198 (CAD)", Radiation Hardening=No, REACH SVHC=No, RoHS=Compliant, Stock=5152, Supplier=Newark, Supplier Part Number=TSM-102-01-L-SV, Termination=Solder, Voltage Rating=475V
J4 J7 J8: Current Rating=2A, Manufacturer=Molex, Manufacturer Part Number=0878310641, Max Operating Temperature=105°C, Min Operating Temperature=-55°C, Supplier Part Number 1=WM3590-ND, Voltage Rating=125V, ComponentLink1Description=Datasheet, ComponentLink1URL=https://tools.molex.com/pdm_docs/ps/PS-87831-027.pdf, Fastening Type="Latch Holder", Gender=Male, Mount="Through Hole", Number of Positions=6, Number of Rows=2, Orientation=Vertical, Part Number=0878310641, Reviewed=No, Series="Milli-Grid 87831", Supplier 1=Digi-Key
J6: library part "4 Digit 7 Seg 1x4 Female Header", "Board Connector, 4 Contact(s), 1 Row(s), Female, Straight, 0.1 inch Pitch, Surface Mount Terminal, Locking", Color=Black, Current Rating=3A, Dielectric Material=Polyamide, Manufacturer=Sullins, Manufacturer Part Number=NPTC041KFXC-RC, Supplier Part Number=S5596-ND, Category="Card Edge Connectors", ComponentLink1Description=https://datasheet.octopart.com:443/NPTC041KFXC-RC-Sullins-datasheet-138810743.pdf?src-supplier=IHS, ComponentLink1URL=https://datasheet.octopart.com:443/NPTC041KFXC-RC-Sullins-datasheet-138810743.pdf?src-supplier=IHS, ComponentLink2Description=https://datasheet.octopart.com:443/NPTC041KFXC-RC-Sullins-datasheet-41308905.pdf?src-supplier=Future+Electronics, ComponentLink2URL=https://datasheet.octopart.com:443/NPTC041KFXC-RC-Sullins-datasheet-41308905.pdf?src-supplier=Future+Electronics, ComponentLink3Description=https://datasheet.octopart.com:443/NPTC041KFXC-RC-Sullins-datasheet-120059.pdf?src-supplier=DigiKey, ComponentLink3URL=https://datasheet.octopart.com:443/NPTC041KFXC-RC-Sullins-datasheet-120059.pdf?src-supplier=DigiKey, Connector Type="Header, Socket", Contact Gender=Female, Contact Material=Bronze, Contact Plating=Tin, Height=7.1mm, Housing Color=Black, Housing Material=Nylon, Lead Free="Lead Free", Length=10.2mm, Lifecycle Status=Production, Mounting Technology="Surface Mount", Number of Positions=4, Number of Rows=2, Packaging=Bulk, Pins=4, Pitch=2.54mm, Pricing="1=0.57, 58=0.43086, 116=0.41026, 522=0.36887, 1044=0.35125, 5046=0.31428, 10034=0.30044 (USD)", REACH SVHC=Yes, RoHS=Compliant, Stock=44539, Supplier=DigiKey, Terminal Pitch=5.08mm, Termination=Solder, Width=2.5mm
J9: library part 0878310641, Current Rating=2A, Manufacturer=Molex, Max Operating Temperature=105°C, Min Operating Temperature=-55°C, Supplier Part Number 1=WM3590-ND, Voltage Rating=125V, ComponentLink1Description=Datasheet, ComponentLink1URL=https://tools.molex.com/pdm_docs/ps/PS-87831-027.pdf, Fastening Type="Latch Holder", Gender=Male, Manufacturer Part Number=0878310641, Mount="Through Hole", Number of Positions=6, Number of Rows=2, Orientation=Vertical, Part Number=0878310641, Reviewed=No, Series="Milli-Grid 87831", Supplier 1=Digi-Key
J12: "IMU", Current Rating=2A, Manufacturer=Adafruit, Manufacturer Part Number=0878310641, Max Operating Temperature=105°C, Min Operating Temperature=-55°C, Supplier Part Number 1=WM3590-ND, Voltage Rating=125V, ComponentLink1Description=Datasheet, ComponentLink1URL=https://tools.molex.com/pdm_docs/ps/PS-87831-027.pdf, Fastening Type="Latch Holder", Gender=Male, Mount="Through Hole", Number of Positions=6, Number of Rows=2, Orientation=Vertical, Part Number=BNO055, Reviewed=No, Series="Milli-Grid 87831", Supplier 1=Digi-Key
O1: "16 MHz ±30ppm Crystal 20pF 40 Ohms HC-49/US", Case/Package=SMD/SMT, ESR (Equivalent Series Resistance)=60Ω, Frequency=16MHz, Frequency Stability=18ppm, Frequency Tolerance=0.001%, Load Capacitance=9pF, Manufacturer=Epson, Manufacturer Part Number="TSX-3225 16.0000MF18X-AC0", Max Operating Temperature=85°C, Min Operating Temperature=-40°C, Supplier Part Number=SER4070CT-ND, Category=Crystals, China RoHS=Compliant, ComponentLink1Description=https://datasheet.octopart.com:443/TSX-3225-16.0000MF18X-AC0-Epson-datasheet-61114919.pdf?src-supplier=Electro+Sonic, ComponentLink1URL=https://datasheet.octopart.com:443/TSX-3225-16.0000MF18X-AC0-Epson-datasheet-61114919.pdf?src-supplier=Electro+Sonic, ComponentLink2Description=https://datasheet.octopart.com:443/TSX-322516.0000MF18X-AC0-Epson-datasheet-189100294.pdf?src-supplier=Electro+Sonic, ComponentLink2URL=https://datasheet.octopart.com:443/TSX-322516.0000MF18X-AC0-Epson-datasheet-189100294.pdf?src-supplier=Electro+Sonic, ComponentLink3Description=https://datasheet.octopart.com:443/TSX-322516.0000MF18X-AC0-Epson-datasheet-180663999.pdf?src-supplier=IHS, ComponentLink3URL=https://datasheet.octopart.com:443/TSX-322516.0000MF18X-AC0-Epson-datasheet-180663999.pdf?src-supplier=IHS, ComponentLink4Description=https://datasheet.octopart.com:443/TSX-3225-16.0000MF18X-AC0-Epson-datasheet-140567378.pdf?src-supplier=Arrow.cn, ComponentLink4URL=https://datasheet.octopart.com:443/TSX-3225-16.0000MF18X-AC0-Epson-datasheet-140567378.pdf?src-supplier=Arrow.cn, ComponentLink5Description=http://sigma.octopart.com:80/149135495/reach_statement/Epson-TSX-3225-16.0000MF18X-AC0.pdf?src-supplier=Compliance+Statements, ComponentLink5URL=http://sigma.octopart.com:80/149135495/reach_statement/Epson-TSX-3225-16.0000MF18X-AC0.pdf?src-supplier=Compliance+Statements, ComponentLink6Description=http://sigma.octopart.com:80/149135496/rohs_statement/Epson-TSX-3225-16.0000MF18X-AC0.pdf?src-supplier=Compliance+Statements, ComponentLink6URL=http://sigma.octopart.com:80/149135496/rohs_statement/Epson-TSX-3225-16.0000MF18X-AC0.pdf?src-supplier=Compliance+Statements, ESR=60Ω, Height=600µm, Length=3.2004mm, Lifecycle Status=Production, Mounting Technology="Surface Mount", Pricing="1=0.37, 10=0.324, 25=0.3068, 50=0.294, 100=0.2819, 250=0.26656, 500=0.25552 (USD)", REACH SVHC=Yes, RoHS=Compliant, Schedule B=8541600080, Stock=610, Supplier=DigiKey, Tolerance=0.001%, Width=2.4892mm